# Altium PCB IBUS_Led.PcbDoc
Units mm, origin at the board's own origin, x right, y up, seen from the top; angles counter-clockwise.
Board outline 22.35 x 20.57 mm, 2 copper layers (Top Layer, Bottom Layer); 27 components, 22 nets, 78 pads, 15 vias.
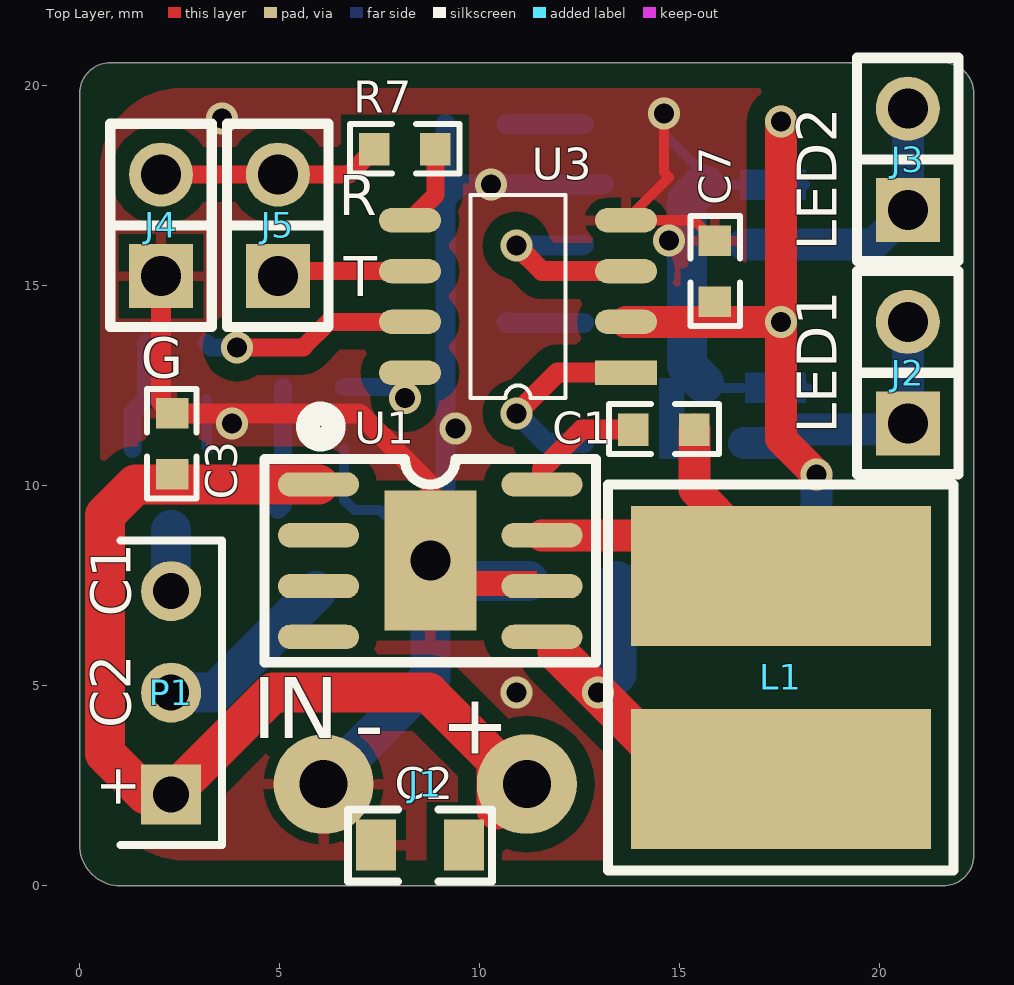
[diagram p0: Top Layer view]
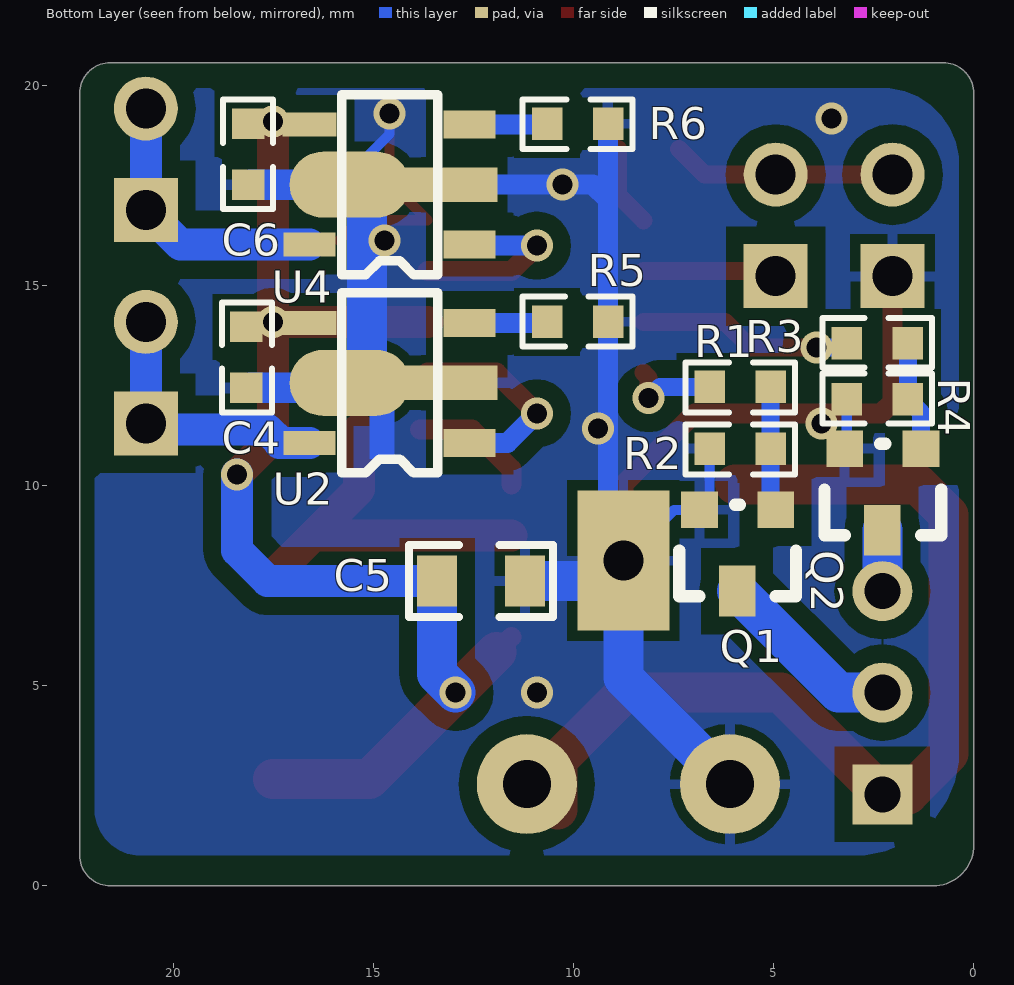
[diagram p1: Bottom Layer view, seen from below]
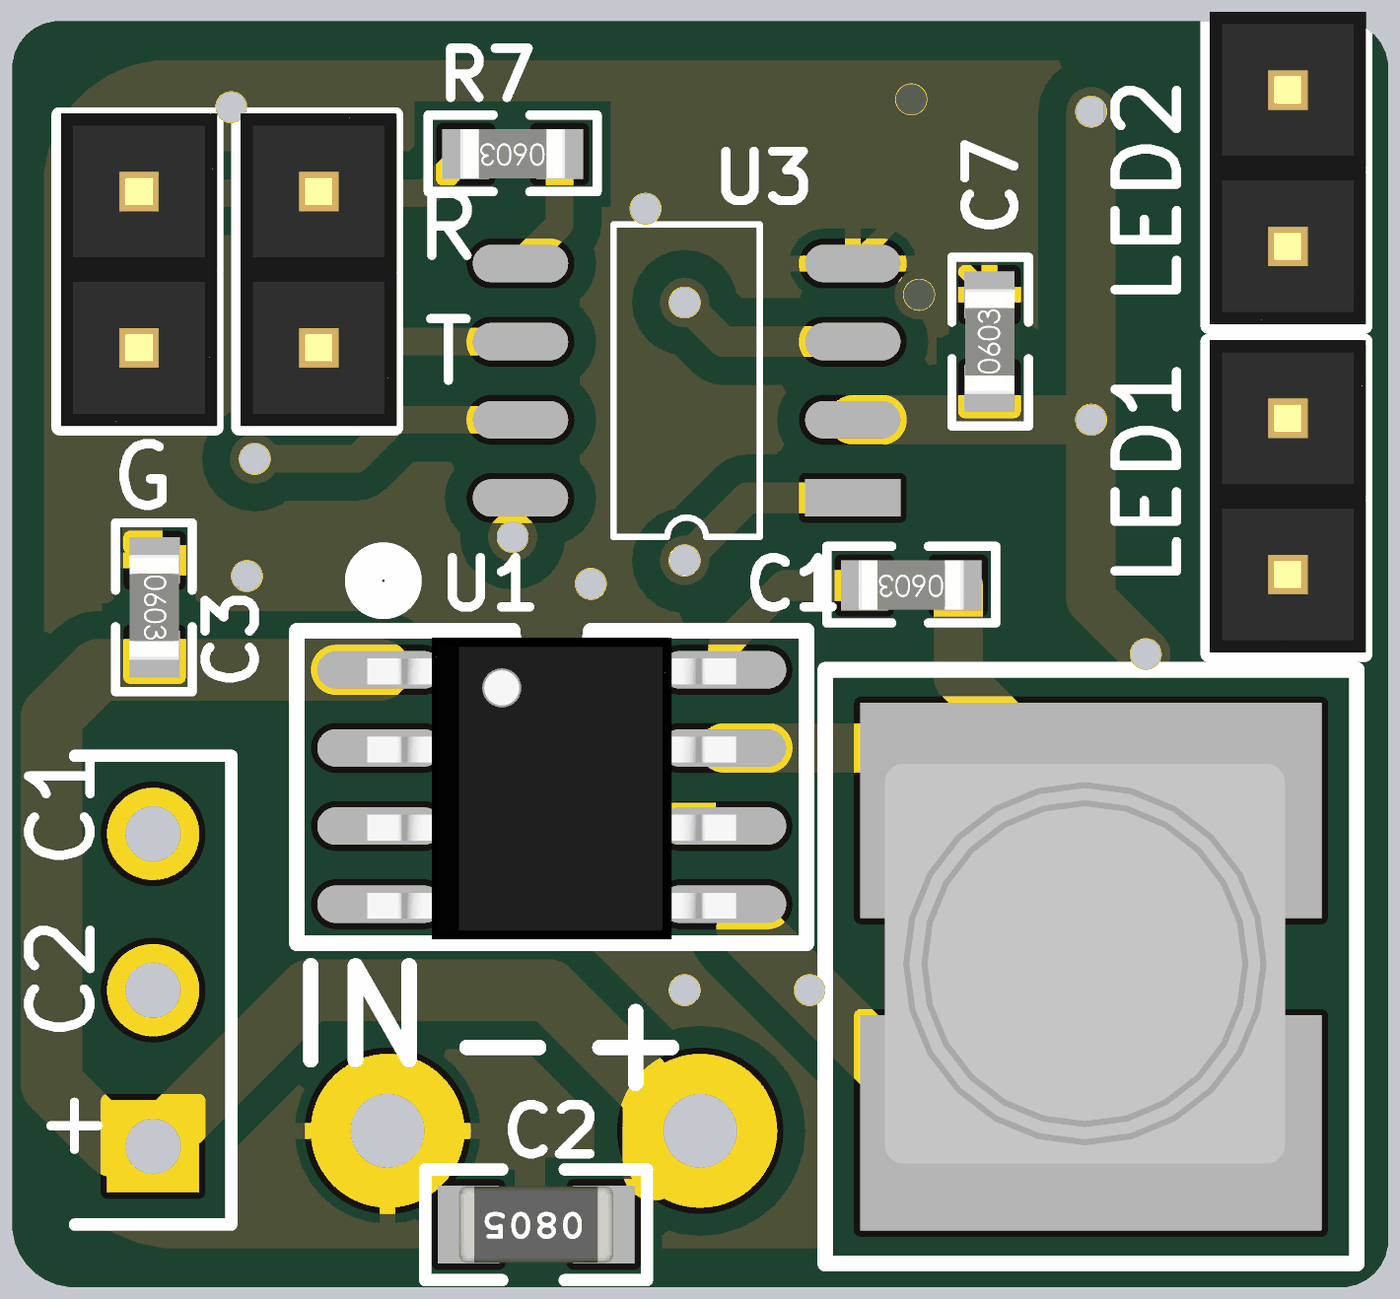
[diagram p2: 3D render of the assembled board from above, using the file's embedded part models]
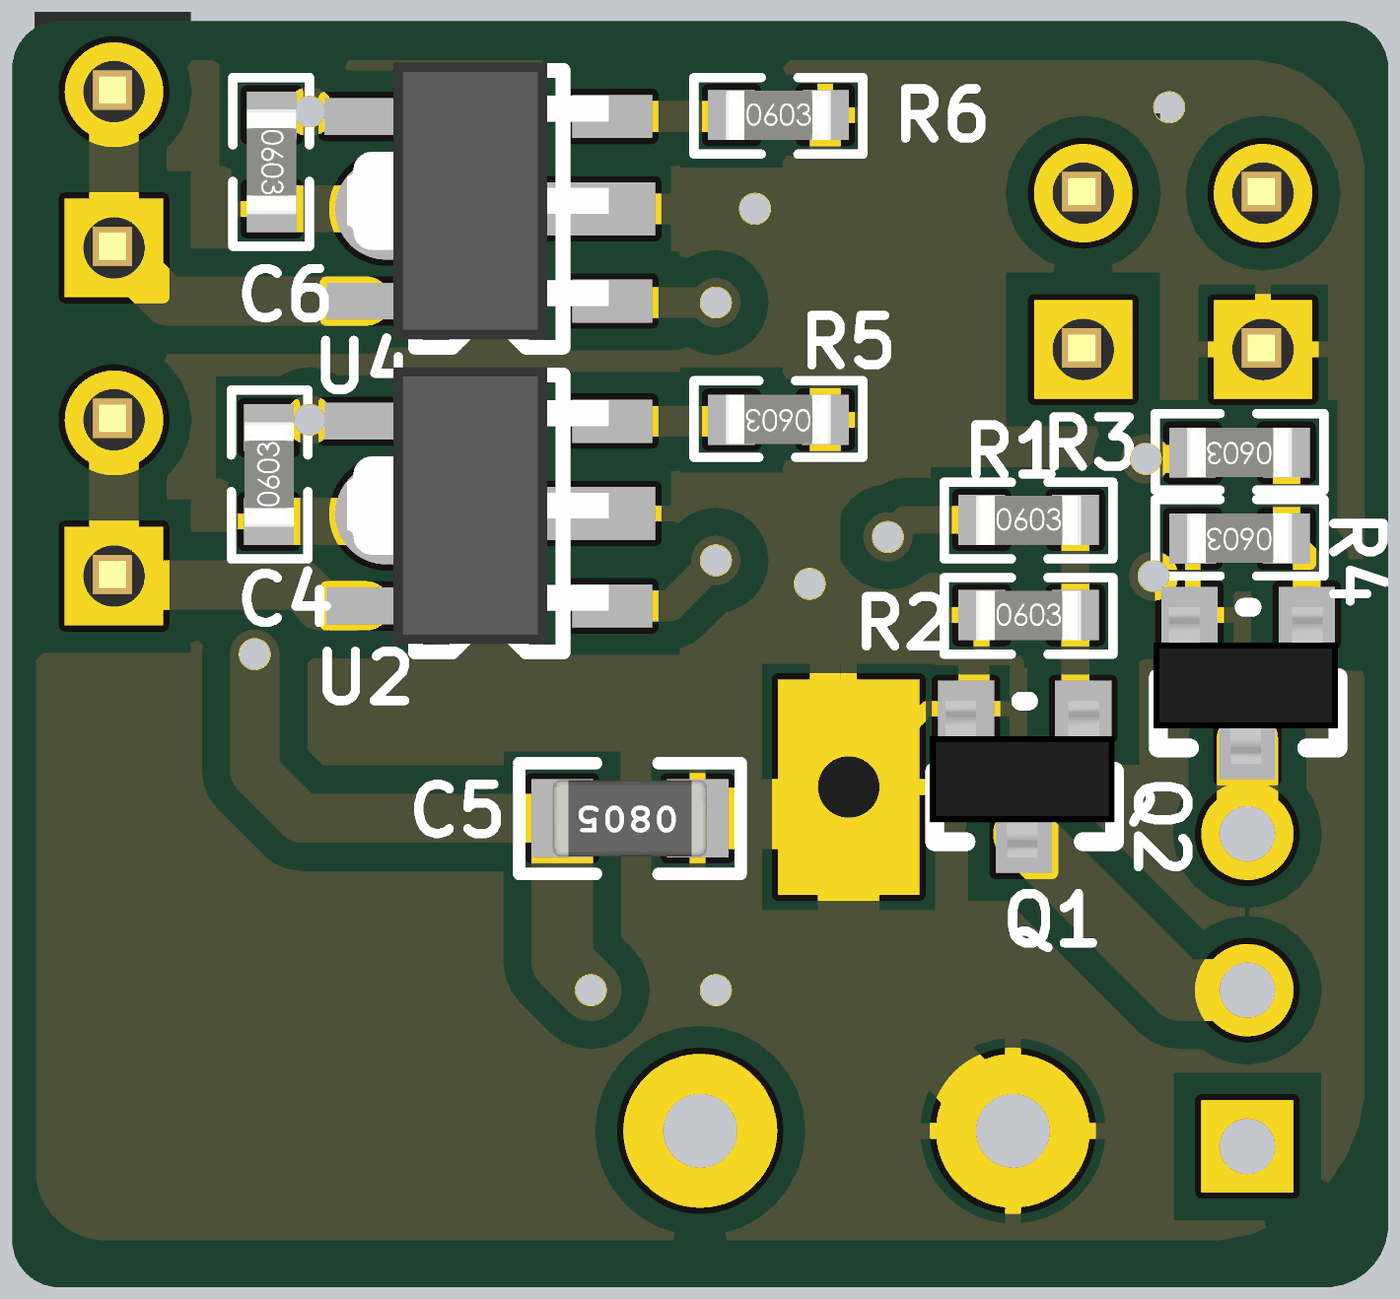
[diagram p3: 3D render of the assembled board from below, using the file's embedded part models]

## Layer stack, top to bottom
Top Solder: solder mask 0.0102, Solder Resist, Dk 3.5
Top Layer: signal copper 0.0356
Dielectric 1: dielectric 0.32, FR-4, Dk 4.8
Bottom Layer: signal copper 0.0356
Bottom Solder: solder mask 0.0102, Solder Resist, Dk 3.5

## Board outline
1.016,0 cw(c1.016,1.016) 0,1.016 0,19.812 cw(c0.762,19.812) 0.762,20.574 21.59,20.574 cw(c21.59,19.812) 22.352,19.812 22.352,0.762 cw(c21.59,0.762) 21.59,0

## Design rules (kind name [scope] priority, off if disabled: settings)
Clearance Clearance_1 [All] p1 off: gap=0.254 ignorepadtopadclearanceinfootprint=FALSE except(0: Arc-Hole Track-Hole SMDPad-Hole THPad-Hole Via-Hole Fill-Hole Poly-Hole Region-Hole Text-Hole)
Clearance [All] p2: gap=0.45 ignorepadtopadclearanceinfootprint=FALSE
PolygonConnect PolygonConnect_1 [IsPad] p1: connectstyle=Relief reliefconductorwidth=0.254 reliefentries=4 polygonreliefangle="90 Angle" airgapwidth=0.254
PolygonConnect [IsVia] p2: connectstyle=Direct reliefconductorwidth=0.254 reliefentries=4 polygonreliefangle="90 Angle" airgapwidth=0.254
RoutingVias [All] p1: holewidth=0.5 width=0.8 viastyle="Through Hole" minholewidth=0.3 minwidth=0.5 maxholewidth=0.711 maxwidth=1.27
SolderMaskExpansion [All] p1: expansion=0.102
Width [All] p1: maxlimit=2 minlimit=0.254 preferedwidth=0.254
30 further rules are at their usual default settings.

## Components (designator, comment, footprint, x,y, rotation, side; value= is the part's Value field where it differs from the comment)
C1 "104" 0603 14.605,11.43 r180 top
C2 "10uF" 0805 8.509,1.016 r180 top
C3 "104" 0603 2.286,11.049 r270 top
C4 "104" 0603 18.161,13.208 r90 bottom
C5 "10uF" 0805 12.319,7.62 r0 bottom
C6 "104" 0603 18.161,18.288 r270 bottom
C7 "104" 0603 15.9,15.367 r90 top
J1 "CON-2" 2EDG5.08V-2P 6.096,2.54 r0 top locked
J2 "CON-2" SIP2 20.701,11.557 r90 top
J3 "CON-2" SIP2 20.701,16.891 r90 top
J4 "CON-2" SIP2 2.032,15.24 r90 top
J5 "CON-2" SIP2 4.953,15.24 r90 top
L1 "10UH/3A" CD75 17.526,5.207 r180 top
P1 "Header 3" HDR1X3 2.286,2.286 r90 top locked
Q1 "AO3400" SOT-23N 4.953,9.398 r0 bottom
Q2 "AO3400" SOT-23N 1.321,10.922 r0 bottom
R1 "100R" 0603 5.842,12.446 r180 bottom
R2 "15K" 0603 5.842,10.897 r180 bottom
R3 "100R" 0603 2.413,13.589 r0 bottom
R4 "15K" 0603 2.413,12.192 r0 bottom
R5 "15K" 0603 9.906,14.122 r0 bottom
R6 "15K" 0603 9.906,19.025 r180 bottom
R7 "100R" 0603 8.128,18.44 r180 top
U1 "IP6503S" ESOP-8 8.763,8.128 r0 top locked
U2 "CN5710" SOT-89-5 14.605,12.573 r90 bottom
U3 "STC15W201S_SOP8" SOP8 13.655,12.827 r180 top locked
U4 "CN5710" SOT-89-5 14.605,17.526 r90 bottom

## Footprints (in the part's own frame and the unit in brackets; to place one, negate y for a bottom-side part, rotate by r counter-clockwise, add the part's x,y. Pads: shape width x height; smd on the part's side, far side on the other; paste and mask are expansions set on the pad)
2EDG5.08V-2P [mm]
  round 2.5 hole 1.2: 1(0,0) 2(5.08,0)
0603 [mil]
  rect 30x32 smd: 1(-30,1) 2(30,1)
  silkscreen extent -54,-24 54,25, body extent -33,-15 33,16, height 22
0805 [mm]
  rect 1x1.27 smd: 1(-1.1,0) 2(1.1,0)
  silkscreen extent -1.8,-0.9 1.8,0.9, body extent -1.25,-0.62 1.25,0.62, height 0.79
CD75 [mm]
  rect 7.5x3.5 smd: 1(0,-2.54) 2(0,2.54)
  silkscreen extent -4.32,-4.83 4.32,4.83, body extent -3.15,-3.3 3.35,3.2, height 4.8
ESOP-8 [mil]
  oval 80x24 smd: 1(-110,75) 2(-110,25) 3(-110,-25) 4(-110,-75) 5(110,-75) 6(110,-25) 7(110,25) 8(110,75)
  rect 90.55x137.8 hole 39.37: 9(0,0)
  silkscreen extent -163,-100 163,145, body extent -118,-97 118,95, height 59
HDR1X3 [mm] "Connector; Header; 3 Position"
  rect 1.5x1.5 hole 0.9: 1(0,0)
  round 1.5 hole 0.9: 2(2.54,0) 3(5.08,0)
  silkscreen extent -1.27,-1.27 6.35,1.27
SIP2 [mm]
  rect 1.6x1.6 hole 1: 1(0,0)
  round 1.6 hole 1: 2(2.54,0)
  silkscreen extent -1.27,-1.27 3.81,1.27, body extent -1.24,-1.3 3.84,1.24, height 8.59
SOP8 [mil]
  rect 61x24 smd: 1(0,0)
  oval 61x24 smd: 2(0,-50) 3(0,-100) 4(0,-150) 5(212.6,-150) 6(212.6,-100) 7(212.6,-50) 8(212.6,0)
  silkscreen extent 60,-175 153,25
SOT-23N [mil]
  rect 36x36 smd: 1(0,0) 3(75,0)
  rect 36x50 smd: 2(38,80)
  silkscreen extent -20,-5 95,85, body extent -20,-5 98,95, height 43
SOT-89-5 [mm]
  rect 0.7x1.3 smd: 1(-1.5,-2) 3(1.5,-2)
  rect 0.864x2.4 smd mask+0.102: 2(0,-1.5)
  oval 1.65x3 smd: 2(0,1)
  rect 0.6x1.35 smd: 4(1.5,2)
  rect 0.6x1.3 smd: 5(-1.5,2)
  silkscreen extent -2.25,-1.2 2.25,1.2, body extent -2.12,-1.94 2.38,2.31, height 1.54

## Part data
C1 C2 C3 C4 C5 C6 C7: library part C
L1: library part IND
P1: "Header, 3-Pin", LatestRevisionDate=17-Jul-2002, LatestRevisionNote="Re-released for DXP Platform.", Publisher="Altium Limited"
Q1 Q2: library part MOS-N, "N-Channel MOSFET", LatestRevisionDate=17-Jul-2002, LatestRevisionNote="Re-released for DXP Platform.", PackageReference=E3, PackageVersion=1995/1996, Published=8-Jun-2000, Publisher="Altium Limited"
R1 R2 R3 R4 R5 R6 R7: library part R, "Res1"

## Via types
v1: diameter 0.8, hole 0.5, Top Layer to Bottom Layer, tented both sides, 15 vias

## Nets (pads, with @x,y where several pads share a name; then routed paths per layer and width w, separated by ;. In a path a pad name is that pad's centre, name@x,y a point inside that pad or via, vN(x,y) a via of type N, cw(c..) or ccw(c..) an arc to the next point about the centre after c; other vN are vias at no path point)
DM: U1.4
DP: U1.3
GND: C2.2 C3.1 C4.1 C5.1 C6.2 C7.2 J1.1 J4.1 Q1.3 Q2.3 R2.1 R4.2 R5.1 R6.2 U1.6 U1.9 U2.2 U3.4 U4.2 | length 62.1
  Top Layer w0.254: J1.1@5.334,2.159 J1.1@5.334,2.878 ; v1(14.605,19.304) 14.605,17.841 14.732,17.714 U3.4 15.367,16.637 C7.2
  Top Layer w0.5: J4.1 2.032,12.09 C3.1 6.985,11.811 8.763,10.033 U1.9
  Bottom Layer w0.254: R4.2 3.175,10.973 Q2.3 ; R2.1 6.604,9.652 Q1.3 7.493,9.398 U1.9 ; v1(14.605,19.304) 14.605,18.796 15.605,17.796 15.605,17.526 C6.2 ; U2.2@15.605,12.573 15.732,12.446 C4.1
  Bottom Layer w0.5: U1.9 9.144,8.509 R5.1 9.144,17.145 ; R6.2 9.144,17.145 ; U4.2@13.105,17.526 9.525,17.526 9.144,17.145
  Bottom Layer w1: J1.1 8.763,5.207 U1.9 9.271,7.62 C5.1 ; U2.2@15.605,12.573 15.176,13.002 U4.2@15.176,17.097 ; U4.2@15.176,17.097 15.605,17.526 15.574,17.526 15.176,17.128 U4.2@15.176,17.097
  other v1: 10.922,4.826 9.398,11.43 3.81,11.557 14.732,16.129 10.287,17.526 3.556,19.177
IBUS: J4.2 J5.2 R7.2 | length 5.6
  Top Layer w0.45: J4.2 J5.2 6.731,17.78 R7.2
LED1: J2.1 J2.2 U2.5 | length 6.9
  Bottom Layer w0.8: U2.5 17.361,11.073 17.361,11.105 17.667,11.411 20.555,11.411 J2.1 J2.2
LED1_C: U2.1 U3.1 | length 5.1
  Top Layer w0.5: v1(10.922,11.811) 11.938,12.827 U3.1
  Bottom Layer w0.5: v1(10.922,11.811) 11.66,11.073 U2.1
LED2: J3.1 J3.2 U4.5 | length 7
  Bottom Layer w0.8: U4.5 19.836,16.026 J3.1 J3.2
LED2_C: U3.3 U4.1 | length 4.7
  Top Layer w0.5: v1(10.922,16.002) 11.557,15.367 U3.3
  Bottom Layer w0.5: v1(10.922,16.002) 12.581,16.002 U4.1
LED3-C: R1.1 U3.8 | length 2.3
  Top Layer w0.45: v1(8.128,12.192) 8.128,12.7 U3.8
  Bottom Layer w0.45: R1.1 7.849,12.471 v1(8.128,12.192)
LED4-C: R3.2 U3.7 | length 5.4
  Top Layer w0.45: v1(3.937,13.462) 5.588,13.462 6.223,14.097 U3.7
  Bottom Layer w0.45: R3.2 3.277,13.462 v1(3.937,13.462)
NetC1_1: C1.1 L1.1 U1.7 | length 9.5
  Top Layer w0.8: U1.7 L1.1@16.51,8.763 ; C1.1 15.367,9.906 L1.1@16.51,8.763 ; L1.1 L1.1@16.51,8.763
NetC1_2: C1.2 U1.8 | length 3.1
  Top Layer w0.5: U1.8 11.557,10.414 12.548,11.405 C1.2
NetP1_2: P1.2 Q1.2 | length 4.7
  Bottom Layer w1: P1.2 3.378,4.826 Q1.2
NetP1_3: P1.3 Q2.2 | length 1.5
  Bottom Layer w1: P1.3 Q2.2
NetQ1_1: Q1.1 R1.2 R2.2 | length 3.1
  Bottom Layer w0.45: Q1.1 5.08,9.525 R2.2 R1.2
NetQ2_1: Q2.1 R3.1 R4.1 | length 2.8
  Bottom Layer w0.45: Q2.1 1.321,11.836 R4.1 R3.1
NetR5_2: R5.2 U2.3 | length 1.9
  Bottom Layer w0.5: R5.2 10.692,14.073 U2.3
NetR6_1: R6.1 U4.3 | length 1.9
  Bottom Layer w0.5: R6.1 10.692,19.026 U4.3
RXD: R7.1 U3.5 | length 2
  Top Layer w0.45: U3.5 8.89,17.272 R7.1
TXD: J5.1 U3.6 | length 3.4
  Top Layer w0.45: J5.1 5.08,15.367 U3.6
VCC: C4.2 C5.2 C6.1 C7.1 L1.2 U1.5 U2.4 U3.2 U4.4 | length 30.7
  Top Layer w0.5: U1.5 11.938,5.842
  Top Layer w0.8: U3.2 v1(17.526,14.097) ; v1(17.526,19.105) v1(17.526,14.097) ; v1(18.415,10.287) 17.526,11.176 v1(17.526,14.097)
  Top Layer w1: 11.938,5.842 v1(12.954,4.826) 15.113,2.667 L1.2
  Bottom Layer w0.8: C5.2 17.653,7.62 18.415,8.382 v1(18.415,10.287)
  Bottom Layer w1: v1(12.954,4.826) 13.419,5.291 C5.2
VIN: C2.1 C3.2 J1.2 P1.1 U1.1 | length 24.8
  Top Layer w1: U1.1 1.397,10.033 0.635,9.271 0.635,3.302 1.651,2.286 P1.1 4.826,4.826 8.72,4.826 10.414,3.132 J1.2@10.414,1.905
pads on no net: U1.2

## Polygon pours and split planes (outlines as drawn)
GND on Bottom Layer "Bottom Layer-GND" (solid, remove dead copper, pour order 0): 20.701,19.939 cw(c20.701,18.669) 20.701,19.939 cw(c20.701,18.669) 21.971,18.669 21.971,1.905 cw(c20.828,1.905) 20.828,0.762 2.972,0.762 cw(c2.972,3.353) 0.381,3.353 0.381,18.038 cw(c2.286,18.034) 2.286,19.939
GND on Top Layer "Top Layer-GND" (solid, remove dead copper, pour order 2): 20.32,19.939 cw(c20.32,18.415) 21.844,18.415 21.844,2.032 cw(c20.447,2.032) 20.447,0.635 2.667,0.635 cw(c2.667,2.794) 0.508,2.794 0.508,17.907 cw(c2.54,17.907) 2.54,19.939

## Other copper
Top Layer:
  rectangle net GND: 9.144,7.239 11.43,7.874
Bottom Layer:
  rectangle net GND: 16.637,12.065 18.161,12.827
  rectangle net GND: 16.51,17.145 18.161,17.907
  rectangle net GND: 14.478,10.668 15.113,12.7

## Silkscreen, mask and mechanical layers (free items; w line width, h text height)
Top Overlay:
  text "R" at 6.477,16.764 h1
  text "LED2" at 18.923,15.875 h1 r90
  text "T" at 6.604,14.732 h1
  text "G" at 1.524,12.7 h1
  text "LED1" at 18.923,11.303 h1 r90
  text "C1" at 1.27,6.731 h1 r90
  text "C2" at 1.27,3.937 h1 r90
  text "IN" at 4.318,3.683 h1.52
  text "-" at 6.858,3.302 h1.52
  text "+" at 9.017,3.302 h1.52
  text "+" at 1.397,1.905 h1 r90
Mechanical 1:
  lines w0.1: 0,1.016 ccw(c1.016,1.016) 1.016,0 21.59,0 ccw(c21.59,0.762) 22.352,0.762 22.352,1.397 22.352,19.812 ccw(c21.59,19.812) 21.59,20.574 1.397,20.574 0.762,20.574 ccw(c0.762,19.812) 0,19.812 0,1.016